# Altium PCB PCB1.PcbDoc
Units mil, origin at the board's own origin, x right, y up, seen from the top; angles counter-clockwise.
Board outline 2700 x 2100 mil, 2 copper layers (Top Layer, Bottom Layer); 51 components, 51 nets, 211 pads, 0 vias.
Unrouted connection lines stored in the file: 145.
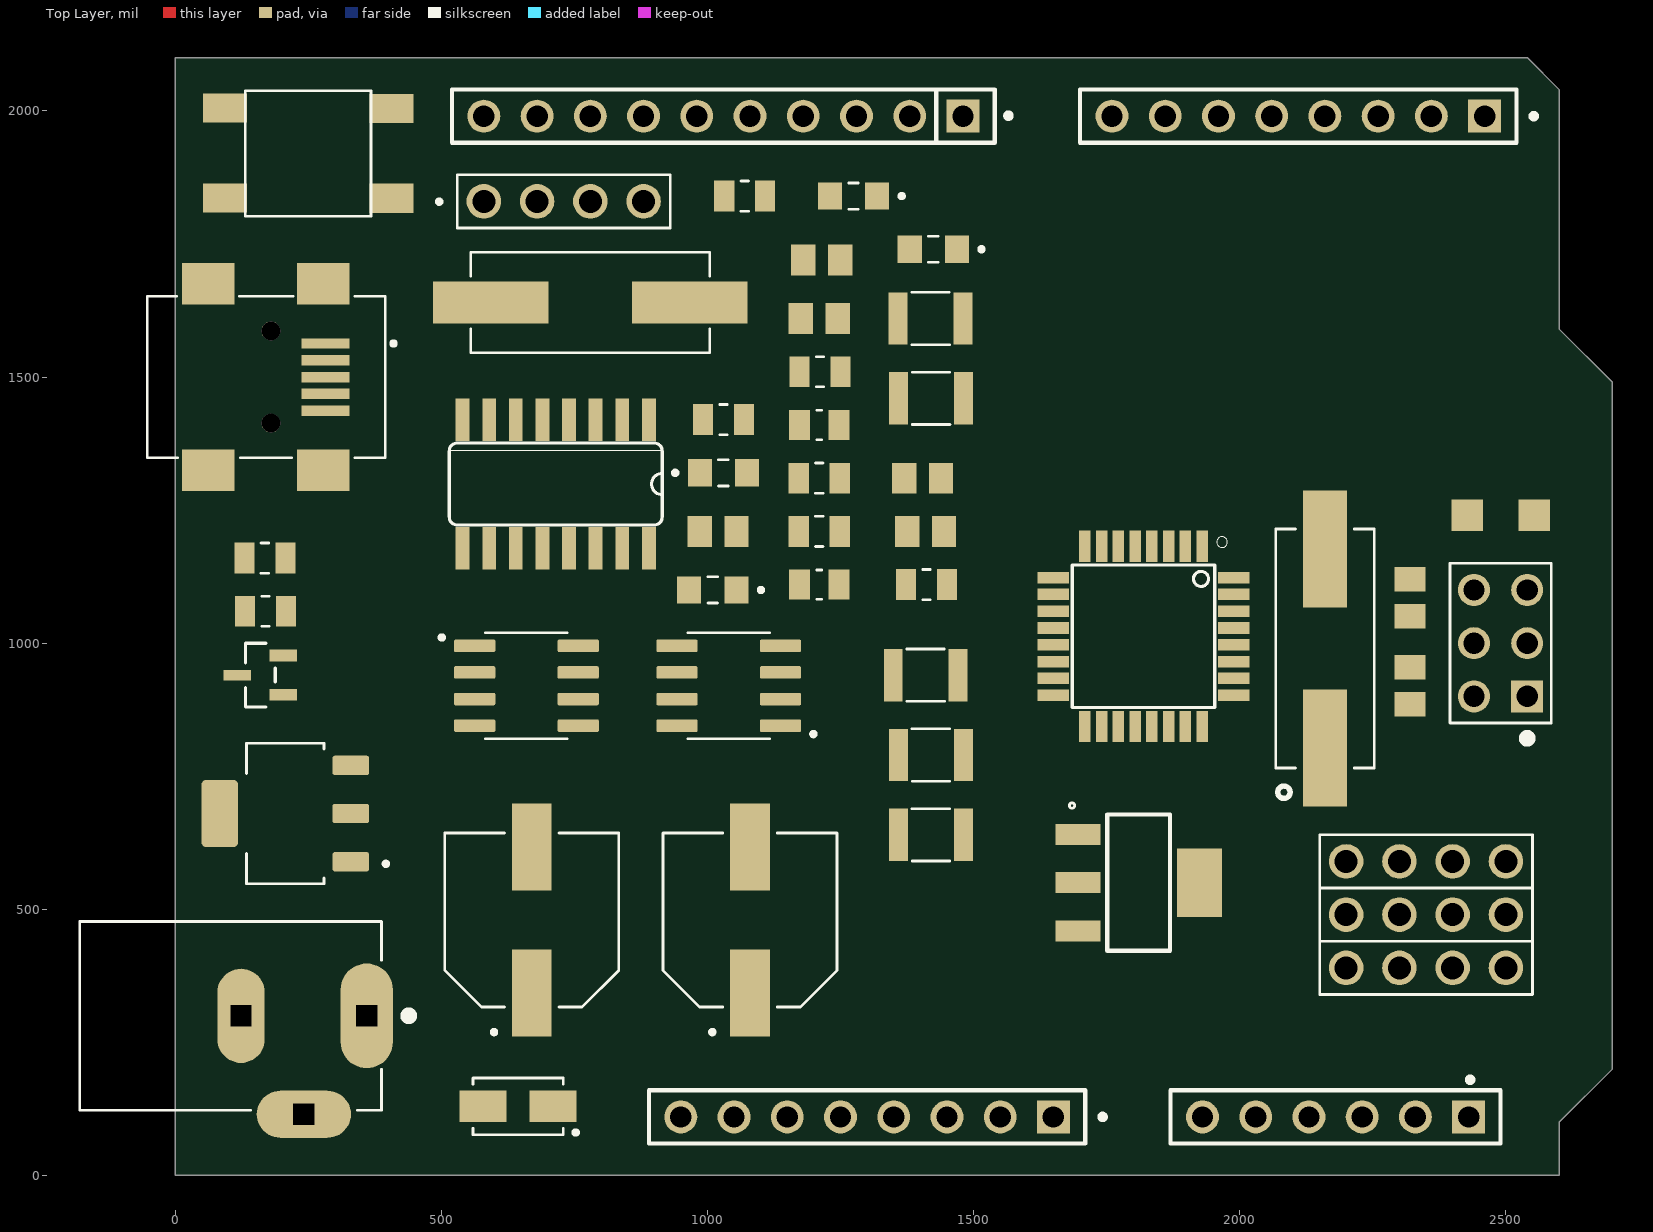
[diagram p0: Top Layer view]
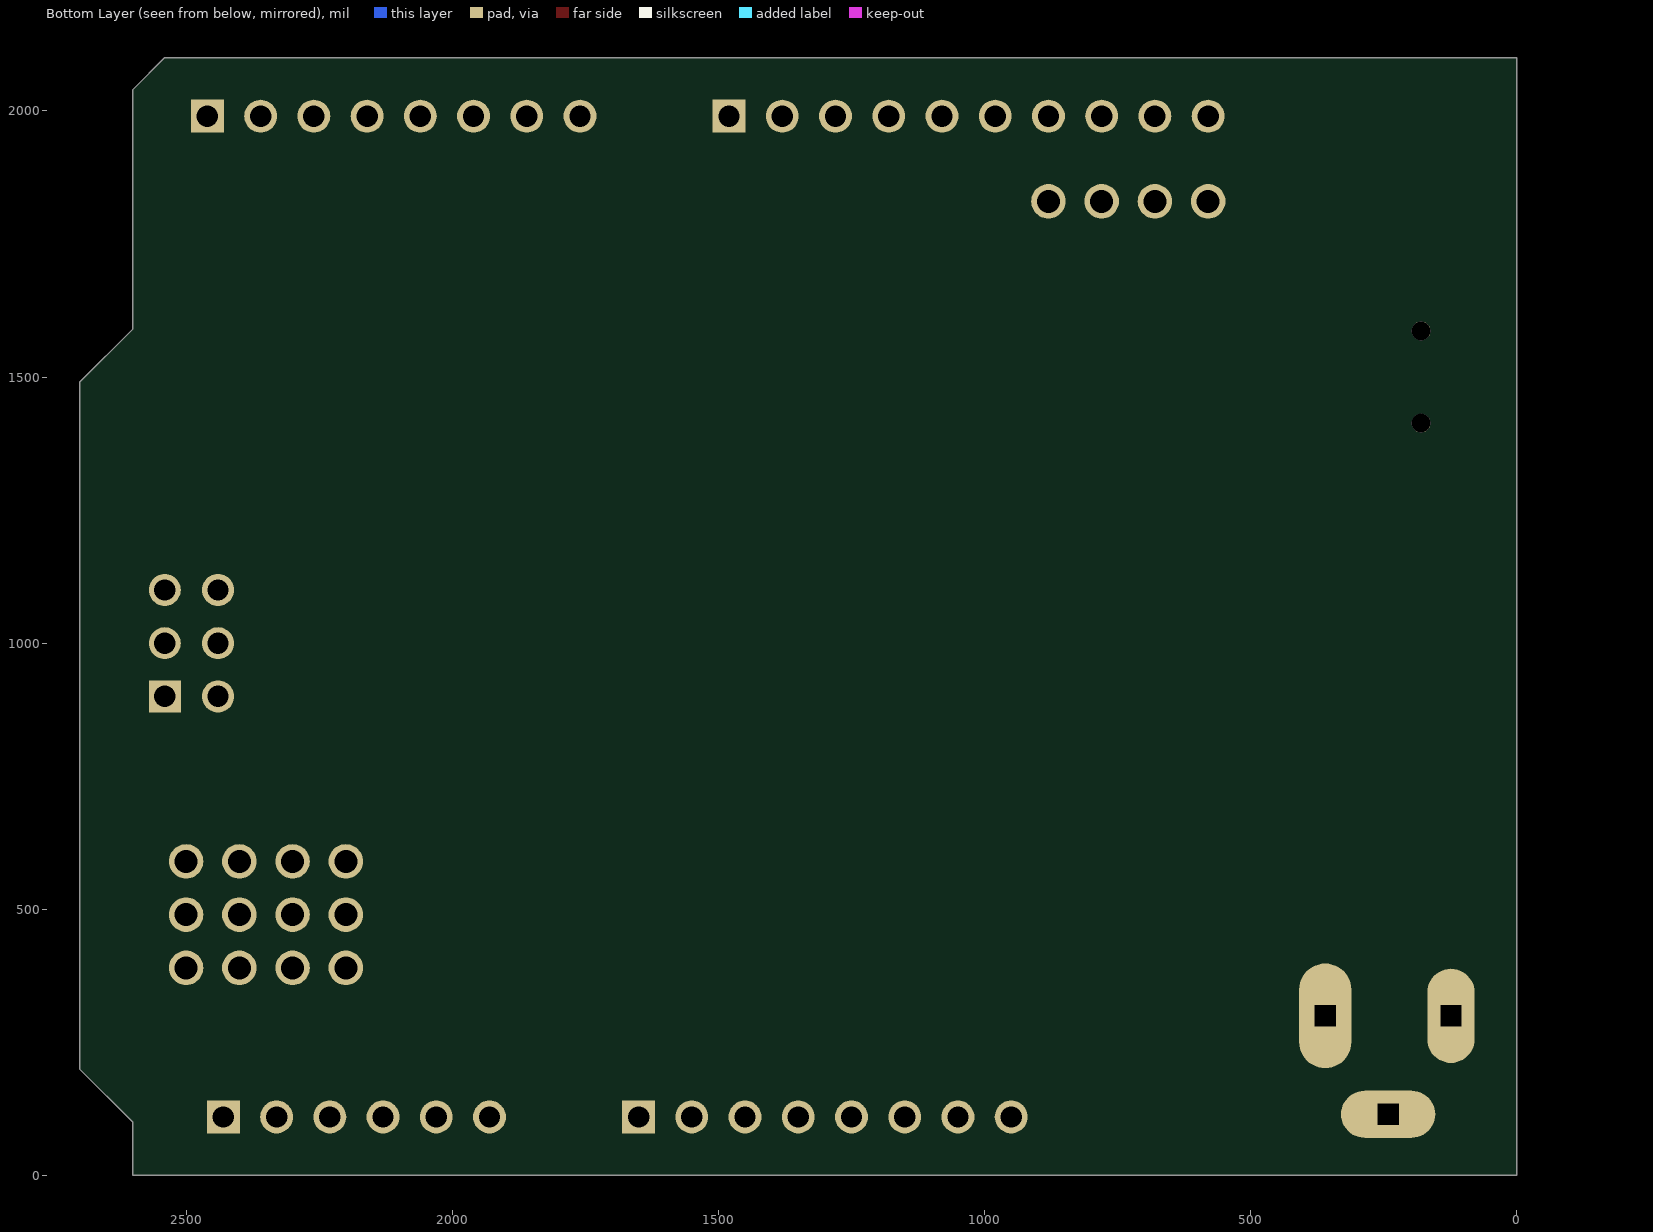
[diagram p1: Bottom Layer view, seen from below]

## Layer stack, top to bottom
Top Solder: solder mask 0.4, Solder Resist, Dk 3.5
Top Layer: signal copper 1.4
Dielectric 1: dielectric 12.6, FR-4, Dk 4.8
Bottom Layer: signal copper 1.4
Bottom Solder: solder mask 0.4, Solder Resist, Dk 3.5

## Board outline
0,0 2600,0 2600,100 2700,200 2700,1490 2600,1590 2600,2040 2540,2100 0,2100

## Design rules (kind name [scope] priority, off if disabled: settings)
Clearance [All] p1: gap=10 ignorepadtopadclearanceinfootprint=FALSE except(0: Arc-Hole Track-Hole SMDPad-Hole THPad-Hole Via-Hole Fill-Hole Poly-Hole Region-Hole Text-Hole)
PolygonConnect [All] p1: connectstyle=Relief reliefconductorwidth=10 reliefentries=4 polygonreliefangle="90 Angle" airgapwidth=10
RoutingVias [All] p1: holewidth=28 width=50 viastyle="Through Hole" minholewidth=28 minwidth=50 maxholewidth=28 maxwidth=50
SolderMaskExpansion [All] p1: expansion=4 istentingtop=FALSE
Width [All] p1: maxlimit=10 minlimit=10 preferedwidth=10
30 further rules are at their usual default settings.

## Classes and differential pairs
component class ARDUINO_UNO_CH340: 

## Components (designator, comment, footprint, x,y, rotation, side; value= is the part's Value field where it differs from the comment)
C1 "CAP ALUM 47UF 20% 25V SMD" CAP_25SVPD47M 1080,480 r90 top
C2 "CAP ALUM 47UF 20% 25V SMD" CAP_25SVPD47M 670,480 r90 top
C3 "C0805J104K5RACTU" CAPC2012X88N 1410,1210 r0 top
C4 "C0805J104K5RACTU" CAPC2012X88N 1404.45,1310 r0 top
C5 "CAP CER 25PF 100V NP0 0805" CAPC2012X94N 2320,920 r90 top
C6 "CAP CER 25PF 100V NP0 0805" CAPC2012X94N 2320,1085.35 r270 top
C7 "885012209041" WCAP-CSGP_885012209041 1420,790 r180 top
C8 "885012209041" WCAP-CSGP_885012209041 1410,940 r180 top
C9 "885012209041" WCAP-CSGP_885012209041 1420,1460 r0 top
C10 "885012209041" WCAP-CSGP_885012209041 1418.98,1610 r0 top
C11 "CAP CER 0805 10NF 50V C0G 1%" CAPC2012X88N 1020,1210 r180 top
C12 "885012209041" WCAP-CSGP_885012209041 1420,640 r180 top
C13 "CAP CER 25PF 100V NP0 0805" CAPC2012X94N 1210,1610 r0 top
C14 "CAP CER 25PF 100V NP0 0805" CAPC2012X94N 1214.65,1720 r0 top
CO1 "CRYSTAL 16.0000MHZ 18PF SMD" XTAL_ABLS2-24.000MHZ-D4YF-T 2160,990 r90 top
CP1 "CONN PWR JACK 2X5.5MM SOLDER" POWERJACK_CUI_PJ-002A 360,300 r180 top
D1 "S1M-FDITR-ND" DIODE_DIOM4226X244N 644.25,130 r180 top
D2 "7012X1" LED_7012X1 1424.29,1740 r180 top
D3 "7012X1" LED_7012X1 1274.29,1840 r180 top
D4 "DIODE GEN PURP 100V 150MA 1206" DIODE 2490,1240 r180 top
D5 "7012X1" LED_7012X1 1010,1100 r180 top
D6 "7012X1" LED_7012X1 1030,1320 r0 top
J1 "Conn_Sullins_PPTC081LFBN-RC_eec" Sullins_PPTC081LFBN-RC_0 1300,110 r180 top
J2 "Conn_Sullins_PPTC101LFBN-RC_eec" "Sullins_PPTC101LFBN-RC_0 - duplicate2" 1030,1990 r180 top locked
J3 "PPTC061LFBN-RC" Sullins_PPTC061LFBN-RC_0 2180,110 r180 top locked
J4 "Conn_Sullins_PPTC081LFBN-RC_eec" Sullins_PPTC081LFBN-RC_0 2110,1990 r180 top locked
J5 "1734035-4" J_SMD_1734035-4-5_0.8_9.9_8.85_3.9 180,1500 r270 top locked
J6 "67997-206HLF" FRAMATOME_67997-206HLF 2490,1000 r90 top locked
K1 "61300411121" 61300411121 2350,390 r180 top
K2 "61300411121" 61300411121 2350,490 r180 top
K3 "61300411121" 61300411121 730,1830 r180 top
K4 "61300411121" 61300411121 2350,590 r0 top
MC1 "ATMEGA328P-AU" QFP80P900X900X120-32N 1819.29,1012.76 r270 top
R1 "1kOhm,0805,1%,50ppm, 100mW,100VRN732ATTDK1001F50" RESC2012X60N 170,1060 r180 top
R2 "1kOhm,0805,1%,50ppm, 100mW,100VRN732ATTDK1001F50" RESC2012X60N 168.5,1160 r0 top
R3 "1kOhm,0805,1%,50ppm, 100mW,100VRN732ATTDK1001F50" RESC2012X60N 1210,1210 r180 top
R4 "1kOhm,0805,1%,50ppm, 100mW,100VRN732ATTDK1001F50" RESC2012X60N 1210,1310 r180 top
R5 "1kOhm,0805,1%,50ppm, 100mW,100VRN732ATTDK1001F50" RESC2012X60N 1411.5,1110 r0 top
R6 "1kOhm,0805,1%,50ppm, 100mW,100VRN732ATTDK1001F50" RESC2012X60N 1070,1840 r180 top
R7 "PICOSMDC050S-2" RESC2012X60N 1211.5,1510 r0 top
R8 "CRGCQ0805F10K" RESC2012X65N 1210,1110 r0 top
R9 "CRGCQ0805F10K" RESC2012X65N 1210,1410 r0 top
R10 "1kOhm,0805,1%,50ppm, 100mW,100VRN732ATTDK1001F50" RESC2012X60N 1030,1420 r0 top
S1 "2-1437565-8" SW_2-1437565-8 250,1920 r180 top
U1 "NCP1117ST50T3G" SOT230P700X180-4N 1810,550 r0 top
U2 "MCP1703T-3302E/DB" "SOT230P700X180-4N - duplicate" 206.97,680 r180 top
U3 "CH340 USB 2.0 to UART Interface Evaluation Board" SO16 715,1299 r180 top
U4 "LM358M/NOPB" SOIC127P599X175-8N 1040,920 r180 top
U5 "SI2301BDS-T1-E3" SOT95P237X112-3N 160,940 r180 top
U6 "LM358M/NOPB" SOIC127P599X175-8N 660,920 r0 top
Y1 "ECS-120-S-5PX-TR" XTAL_ECS-120-S-5PX-TR 780,1640 r180 top

## Footprints (in the part's own frame and the unit in brackets; to place one, negate y for a bottom-side part, rotate by r counter-clockwise, add the part's x,y. Pads: shape width x height; smd on the part's side, far side on the other; paste and mask are expansions set on the pad)
61300411121 [mm]
  round 1.65 hole 1.1: 1(-3.81,0) 2(-1.27,0) 3(1.27,0) 4(3.81,0)
  silkscreen extent -5.08,-1.27 5.08,1.27, body extent -5.01,-1.28 5.15,1.26, height 8.05
CAP_25SVPD47M [mm]
  rect 4.15x1.9 smd: 1(-3.475,0) 2(3.475,0)
  silkscreen extent -5.45,-4.15 4.15,4.15, body extent -3.25,-3.17 3.75,3.43, height 5.38
CAPC2012X88N [mm]
  rect 1.16x1.47 smd: 1(-0.875,0) 2(0.875,0)
  body extent -1.1,-0.73 1.1,0.72, height 0.98
CAPC2012X94N [mm]
  rect 1.16x1.47 smd: 1(-0.88,0) 2(0.88,0)
  body extent -1.01,-0.62 1.01,0.62, height 0.91
DIODE [mm]
  rect 1.5x1.5 smd: NEG(1.6,0) POS(-1.6,0)
  body extent -1.58,-0.65 1.42,0.65, height 0.75
DIODE_DIOM4226X244N [mm]
  rect 2.26x1.51 smd: 1(-1.67,0) 2(1.67,0)
  silkscreen extent -2.85,-1.35 2.15,1.35, body extent -2.6,-1.36 2.6,1.36, height 2.65
FRAMATOME_67997-206HLF [mm]
  rect 1.53x1.53 hole 1.02: 1(-2.54,-1.27)
  round 1.53 hole 1.02: 2(-2.54,1.27) 3(0,-1.27) 4(0,1.27) 5(2.54,-1.27) 6(2.54,1.27)
  silkscreen extent -4.74,-2.41 3.81,2.41, body extent -3.81,-2.41 3.81,2.41, height 8.39
J_SMD_1734035-4-5_0.8_9.9_8.85_3.9 [mm]
  rect 0.5x2.3 smd: 1(-1.6,2.6) 2(-0.8,2.6) 3(0,2.6) 4(0.8,2.6) 5(1.6,2.6)
  rect 2x2.5 smd: S1(-4.45,2.5) S2(4.45,2.5) S3(-4.45,-3) S4(4.45,-3)
  round 0.9 hole 0.9 unplated: ""(-2.2,0) ""(2.2,0)
  silkscreen extent -3.85,-5.9 3.85,5.95, body extent -4.99,-5.9 4.91,3.3, height 4.1
LED_7012X1 [mm]
  rect 1.15x1.3 smd: A(1.125,0) C(-1.125,0)
  silkscreen extent -2.4,-0.63 0.23,0.63, body extent -1.01,-0.62 1,0.62, height 0.75
POWERJACK_CUI_PJ-002A [mm]
  oval 2.5x5 hole 1 square: 1(0,0)
  oval 2.25x4.5 hole 1 square: 2(6,0)
  oval 4.5x2.25 hole 1 square: 3(3,4.7)
  silkscreen extent -2.2,-4.5 13.7,4.5, body extent -0.72,-4.83 13.68,4.57, height 11
QFP80P900X900X120-32N [mm]
  rect 1.5x0.55 smd: 1(-4.3,2.8) 2(-4.3,2) 3(-4.3,1.2) 4(-4.3,0.4) 5(-4.3,-0.4) 6(-4.3,-1.2) 7(-4.3,-2) 8(-4.3,-2.8) 17(4.3,-2.8) 18(4.3,-2) 19(4.3,-1.2) 20(4.3,-0.4) 21(4.3,0.4) 22(4.3,1.2) 23(4.3,2) 24(4.3,2.8)
  rect 0.55x1.5 smd: 9(-2.8,-4.3) 10(-2,-4.3) 11(-1.2,-4.3) 12(-0.4,-4.3) 13(0.4,-4.3) 14(1.2,-4.3) 15(2,-4.3) 16(2.8,-4.3) 25(2.8,4.3) 26(2,4.3) 27(1.2,4.3) 28(0.4,4.3) 29(-0.4,4.3) 30(-1.2,4.3) 31(-2,4.3) 32(-2.8,4.3)
  silkscreen extent -4.75,-3.4 3.4,4, body extent -4.42,-4.53 4.57,4.47, height 1.01
RESC2012X60N [mm]
  rect 0.96x1.47 smd: 1(-0.978,0) 2(0.978,0)
  silkscreen extent -0.18,-0.72 0.18,0.72, body extent -1.01,-0.61 0.99,0.64, height 0.61
RESC2012X65N [mm]
  rect 1x1.42 smd: 1(-0.935,0) 2(0.935,0)
  silkscreen extent -0.12,-0.7 0.12,0.7, body extent -0.99,-0.63 1.01,0.62, height 0.63
SO16 [mil]
  rect 26x80 smd: 1(-175,-121) 2(-125,-121) 3(-75,-121) 4(-25,-121) 5(25,-121) 6(75,-121) 7(125,-121) 8(175,-121) 9(175,121) 10(125,121) 11(75,121) 12(25,121) 13(-25,121) 14(-75,121) 15(-125,121) 16(-175,121)
  silkscreen extent -200,-77 200,77, body extent -197,-156 204,156, height 77
SOIC127P599X175-8N [mm]
  rrect25% 1.97x0.6 smd: 1(-2.47,1.905) 2(-2.47,0.635) 3(-2.47,-0.635) 4(-2.47,-1.905) 5(2.47,-1.905) 6(2.47,-0.635) 7(2.47,0.635) 8(2.47,1.905)
  silkscreen extent -4.14,-2.52 1.95,2.52, body extent -3,-2.45 3,2.45, height 1.73
SOT95P237X112-3N [mil]
  rect 52x22 smd: 1(-43,37) 2(-43,-37)
  rect 52x20 smd: 3(43,0)
  silkscreen extent -28,-60 28,60, body extent -49,-57 50,57, height 37
SOT230P700X180-4N [mm]
  rect 2.15x1 smd: 1(-2.9,2.3) 2(-2.9,0) 3(-2.9,-2.3)
  rect 2.15x3.25 smd: 4(2.9,0)
  silkscreen extent -3.3,-3.25 1.5,3.81, body extent -3.12,-3.2 3.88,3.3, height 1.65
"SOT230P700X180-4N - duplicate" [mm]
  rrect25% 1.76x0.92 smd: 1(-3.125,2.3) 2(-3.125,0) 3(-3.125,-2.3)
  rrect25% 1.76x3.19 smd: 4(3.125,0)
  silkscreen extent -4.9,-3.35 1.85,3.35, body extent -3.54,-3.26 3.46,3.24, height 1.8
Sullins_PPTC061LFBN-RC_0 [mm]
  rect 1.57x1.57 hole 1.02 paste-1000 mask+0: 1(-6.35,0)
  round 1.57 hole 1.02 paste-1000 mask+0: 2(-3.81,0) 3(-1.27,0) 4(1.27,0) 5(3.81,0) 6(6.35,0)
  silkscreen extent -7.87,-1.9 7.87,1.27, body extent -8.15,-1.47 8.15,1.47, height 0.25
Sullins_PPTC081LFBN-RC_0 [mm]
  rect 1.57x1.57 hole 1.02 paste-1000 mask+0: 1(-8.89,0)
  round 1.57 hole 1.02 paste-1000 mask+0: 2(-6.35,0) 3(-3.81,0) 4(-1.27,0) 5(1.27,0) 6(3.81,0) 7(6.35,0) 8(8.89,0)
  silkscreen extent -11.36,-1.27 10.41,1.27, body extent -10.69,-1.47 10.69,1.47, height 0.25
"Sullins_PPTC101LFBN-RC_0 - duplicate2" [mm]
  rect 1.57x1.57 hole 1.02 paste-1000 mask+0: 1(-11.43,0)
  round 1.57 hole 1.02 paste-1000 mask+0: 2(-8.89,0) 3(-6.35,0) 4(-3.81,0) 5(-1.27,0) 6(1.27,0) 7(3.81,0) 8(6.35,0) 9(8.89,0) 10(11.43,0)
  silkscreen extent -13.73,-1.27 12.95,1.27, body extent -13.23,-1.47 13.23,1.47, height 0.25
SW_2-1437565-8 [mm]
  rect 2.1x1.4 smd: 1(-3.974,2.135) 2(3.974,2.123) 3(-3.974,-2.148) 4(3.974,-2.168)
  silkscreen extent -6.35,-3 3,3, body extent -3.85,-3 3.85,3, height 4.13
WCAP-CSGP_885012209041 [mm]
  rect 0.9x2.5 smd: 1(-1.55,0) 2(1.55,0)
  silkscreen extent -0.9,-1.25 0.91,1.25, body extent -1.6,-1.25 1.6,1.25, height 0.96
XTAL_ABLS2-24.000MHZ-D4YF-T [mm]
  rect 5.6x2.1 smd: 1(-4.75,0) 2(4.75,0)
  silkscreen extent -7.15,-2.35 5.7,2.35, body extent -6.35,-2.48 6.35,2.35, height 4.03
XTAL_ECS-120-S-5PX-TR [mm]
  rect 5.5x2 smd: 1(-4.75,0) 2(4.75,0)
  silkscreen extent -5.7,-2.4 5.7,2.4, body extent -6.53,-2.4 6.67,2.4, height 4.31

## Part data
C1 C2: library part 25SVPD47M, "47 µF 25 V Aluminum Electrolytic Capacitors Radial, Can - SMD - 3000 Hrs @ 105°C", Package=None, Supplier Part Number 1=31T8177, Availability=Unavailable, MP=25SVPD47M, Price=None, Supplier 1=Newark
C3 C4: "CAP MLCC, 0.1UF, 50V, X7R, 10%, 0805; Product Range: KEMET - J Series; Capacitance", Package="0805 KEMET", Supplier Part Number 1=399-9997-1-ND, Availability=Warning, MF=KEMET, Mouser-Purchase-URL=https://snapeda.com/shop?store=Mouser&id=1757688, MP=C0805J104K5RACTU, Price=None, SnapEDA_Link=https://www.snapeda.com/parts/C0805J104K5RACTU/KEMET/view-part/1757688/?ref=snap, Supplier 1=Digi-Key
C5 C6 C13 C14: library part 08051A250GAT2A, "25 pF ±2% 100V Ceramic Capacitor C0G, NP0 0805 (2012 Metric)", Package=None, Supplier Part Number 1=08051A250GAT2A-ND, Availability=Unavailable, MP=08051A250GAT2A, Price=None, Supplier 1=Digi-Key
C7 C8 C9 C10 C12: "WCAP-CSGP General Purpose MLCC; SMT 1210; X7R; 100nF 10%; 50V; -55C to +125C; Tech. PN X7R1210104K050DFCT1000", Package=None, Availability=Unavailable, MP=885012209041, Price=None
C11: library part C0805C103F5GEC-ND, "±1% 50V Ceramic Capacitor C0G, NP0 0805 (2012 Metric)", Package="0805 KEMET", Availability=Warning, MF=KEMET, Mouser-Purchase-URL=https://snapeda.com/shop?store=Mouser&id=1757688, MP=C0805J104K5RACTU, Price=None, SnapEDA_Link=https://www.snapeda.com/parts/C0805J104K5RACTU/KEMET/view-part/1757688/?ref=snap, Supplier 1=Digi-Key, Supplier Part Number 1=C0805C103F5GEC-ND
CO1: library part ABLS2-24.000MHZ-D4YF-T, "24MHz Â±30ppm Crystal 18pF 40 Ohms HC-49/US", Package="HC49/US Abracon", Supplier Part Number 1=535-10212-1-ND, Availability=Good, Check_prices=https://www.snapeda.com/parts/ABLS2-24.000MHZ-D4YF-T/Abracon%20LLC/view-part/412221/?ref=eda, MF=Abracon, MP=ABLS2-24.000MHZ-D4YF-T, Price=None, Purchase-URL=https://pricing.snapeda.com/search/part/ABLS2-24.000MHZ-D4YF-T/?ref=eda, SnapEDA_Link=https://www.snapeda.com/parts/ABLS2-24.000MHZ-D4YF-T/Abracon%20LLC/view-part/412221/?ref=snap, Supplier 1=Digi-Key
CP1: library part CP-002A-ND, "Power Barrel Connector Jack 2.10mm ID (0.083\"), 5.50mm OD (0.217\") Through Hole, Right Angle", Supplier Part Number 1=PJ-002AH-SMT-TR, Supplier 1=Onlinecomponents.com
D1: library part DIODE_S1G, "DIODE GEN PURP 1KV 1A SMA", Package="DO-214AC-214 ON Semiconductor", Supplier Part Number 1=S1M-FDICT-ND, Availability=Unavailable, MF="ON Semiconductor", MP=ES1G, Price=None, SnapEDA_Link=https://www.snapeda.com/parts/ES1G/ON%20Semiconductor/view-part/1427700/?ref=snap, Supplier 1=Digi-Key
D2 D3 D5 D6: "Red LED Indication - Discrete 1.7V 0805 (2012 Metric)", Package=None, Supplier Part Number 1=732-4984-1-ND, Availability=Unavailable, MP=7012X1, Price=None, Supplier 1=Digi-Key
D4: library part CD1206-S01575, "Diode Standard 100V 150mA Surface Mount 1206", Package="1206 Bourns", Availability=Unavailable, MF=Bourns, MP=CD1206-S01575, Price=None, SnapEDA_Link=https://www.snapeda.com/parts/CD1206-S01575/Bourns%20-%20J.W.%20Miller/view-part/42622/?ref=snap, Supplier 1=Avnet, Supplier Part Number 1=CD1206-S01575
J1 J4: "CONN HEADER FEMALE 8POS .1\" TIN", Digikey Part Number=S7006-ND, Manufacturer=Sullins, Package=HDR8, Part Number=PPTC081LFBN-RC, Temperature="-40°C to +105°C", Temperature Range High=+105°C, Temperature Range Low=-40°C, ComponentLink1Description=Upverter, ComponentLink1URL=https://upverter.com/upn/revision/35dac8b21b21bbc7/, ComponentLink2Description=Datasheet, ComponentLink2URL=http://www.sullinscorp.com/drawings/78_P(N)PxCxxxLFBN-RC,_10492-H.pdf, Digikey Description="CONN HEADER FEMALE 8POS .1\" TIN", helpURL=https://upverter.com/upn/revision/35dac8b21b21bbc7/, Is Female=yes, Lead Free=yes, Price=0.506645376634, RoHS=TRUE, Supplier 1=Digi-Key, Supplier 2=Mouser, Supplier Part Number 1=S7006-ND
J2: "CONN HEADER FEMALE 10POS.1\" TIN", Digikey Part Number=S7008-ND, Manufacturer=Sullins, Octopart Part Number=a3ed6ae3a4397c2a, Package=HDR10, Part Number=PPTC101LFBN-RC, Temperature="-40°C to +105°C", Temperature Range High=+105°C, Temperature Range Low=-40°C, Category 75Fab8F04590Ae3D="Connectors and Adapters", Category 0836C53C3D42D3F1=Connectors, Category A3C16Ecb93907806=Uncategorized, Category Bda670Ac885E6661=Uncategorized, Category E7012A0Bd22E3Cc6="Headers & Receptacles", ComponentLink1Description=Upverter, ComponentLink1URL=https://upverter.com/upn/revision/438243a39a4aeeed/, ComponentLink2Description=Datasheet, ComponentLink2URL=http://www.sullinscorp.com/drawings/78_P(N)PxCxxxLFBN-RC,_10492-H.pdf, contact_material="Phosphor Bronze", Digikey Description="CONN HEADER FEMALE 10POS.1\" TIN", helpURL=https://upverter.com/upn/revision/438243a39a4aeeed/, housing_material=Plastic, Is Female=yes, Lead Free=yes, Mounting Type="through hole", Num Pins=10, Number_of_Positions=10, number_of_rows=1, pin_pitch="2.54 mm", Price=0.506714616829, RoHS=TRUE, Supplier 1=Digi-Key, Supplier 2=Mouser, Supplier Part Number 1=S7008-ND, Symbol 0 0=Standard, Type="integrated circuit"
J5: "Conn Mini USB 2.0 Type B RCP 5 POS 0.8mm Solder RA SMD 5 Terminal 1 Port Automotive T/R", Package=None, Centerline_Pitch=".8 mm[.031 in]", Digi-Key_Part_Number=A121554CT-ND, Digi-Key_Purchase_URL=https://www.digikey.com/product-detail/en/te-connectivity-amp-connectors/1734035-4/A121554CT-ND/5246531?utm_source=snapeda&utm_medium=aggregator&utm_campaign=symbol, EU_RoHS_Compliance=Compliant, MF="TE Connectivity", MP=1734035-4, Number_of_Positions=5, Product_Type=Connector, SnapEDA_Link=https://www.snapeda.com/parts/1734035-4/TE%20Connectivity%20AMP%20Connectors/view-part/422958/?ref=snap, TE_purchase_URL=https://www.te.com/usa-en/product-1734035-4.html?te_bu=Cor&te_type=disp&te_campaign=seda_glo_cor-seda-global-disp-prtnr-fy19-seda-model-bom-cta_sma-317_1&elqCampaignId=32493
J6: "Connector Header Through Hole 6 position 0.100 _2.54mm_", Package=None, Digi-Key_Part_Number=609-3234-ND, Digi-Key_Purchase_URL=https://www.digikey.com/product-detail/en/amphenol-icc-fci/67997-206HLF/609-3234-ND/1878491?utm_source=snapeda&utm_medium=aggregator&utm_campaign=symbol, MF="Amphenol ICC", MP=67997-206HLF, SnapEDA_Link=https://www.snapeda.com/parts/67997-206HLF/Amphenol%20FCI/view-part/103429/?ref=snap
K1 K2 K3 K4: "Connector Header Through Hole 4 position 0.100 (2.54mm)", Package=None, Availability="In Stock", Check_prices=https://www.snapeda.com/parts/61300411121/W%C3%BCrth%20Elektronik/view-part/4802916/?ref=eda, MF="WÃ¼rth Elektronik", MP=61300411121, Price=None, SnapEDA_Link=https://www.snapeda.com/parts/61300411121/W%C3%BCrth%20Elektronik/view-part/4802916/?ref=snap
MC1: "AVR AVRÂ® ATmega Microcontroller IC 8-Bit 20MHz 32KB _16K x 16_ FLASH 32-TQFP _7x7_", Package="TQFP-32 Microchip", Supplier Part Number 1=1310271, Availability=Unavailable, MF=Microchip, MP=ATMEGA328P-AU, Price=None, SnapEDA_Link=https://www.snapeda.com/parts/ATMEGA328P-AU/Microchip/view-part/44280/?ref=snap, Supplier 1=RSComponents
R1 R2 R3 R4 R5 R6 R10: "Thin Film Resistors - SMD 1kOhm,0805,1%,50ppm, 100mW,100V", Package=None, Supplier Part Number 1=7028531, Availability=Unavailable, MP=RN732ATTDK1001F50, Price=None, Supplier 1="Future Electronics"
R7: "Polymeric PTC Resettable Fuse 6V 500mA Ih Surface Mount 0805 _2012 Metric_, Concave", Package="0805 TE Connectivity", Supplier Part Number 1=PICOSMDC050S-2CT-ND, Availability=Unavailable, MF="Littelfuse Inc.", MP=PICOSMDC050S-2, Price=None, SnapEDA_Link=https://www.snapeda.com/parts/PICOSMDC050S-2/Littelfuse%20Inc./view-part/1315044/?ref=snap, Supplier 1=Digi-Key
R8 R9: "Fixed Resistor CRGCQ 0805 10K 1%", Package="2012 TE Connectivity", Supplier Part Number 1=A129761CT-ND, Arrow_Electronics-Purchase-URL=https://snapeda.com/shop?store=Arrow+Electronics&id=3188209, Availability=Unavailable, DigiKey-Purchase-URL=https://snapeda.com/shop?store=DigiKey&id=3188209, MF="TE Connectivity", MP=CRGCQ0805F10K, Price=None, SnapEDA_Link=https://www.snapeda.com/parts/CRGCQ0805F10K/TE%20Connectivity/view-part/3188209/?ref=snap, Supplier 1=Digi-Key
S1: "Tactile Switch SPST-NO Top Actuated Surface Mount", Contact_Current_Rating="50 mA", Package=None, Supplier Part Number 1=450-3355-ND, Availability=Unavailable, Configuration_Pole-Throw="Single Pole - Single Throw", MF="TE Connectivity", MP=2-1437565-8, Price=None, SnapEDA_Link=https://www.snapeda.com/parts/2-1437565-8/TE%20Connectivity%20ALCOSWITCH%20Switches/view-part/455292/?ref=snap, Supplier 1=Digi-Key, TE_purchase_URL=https://www.te.com/usa-en/product-2-1437565-8.html?te_bu=Cor&te_type=disp&te_campaign=seda_glo_cor-seda-global-disp-prtnr-fy19-seda-model-bom-cta_sma-317_1&elqCampaignId=32493
U1: "Linear Voltage Regulator IC 1 Output 1A SOT-223", Package="TO-261-4 ON Semiconductor", Supplier Part Number 1=71J6563, Availability=Unavailable, MF="ON Semiconductor", MP=NCP1117ST50T3G, Price=None, SnapEDA_Link=https://www.snapeda.com/parts/NCP1117ST50T3G/ON%20Semiconductor/view-part/836318/?ref=snap, Supplier 1=Newark
U2: "Linear Voltage Regulator IC 1 Output 250mA SOT-223-3", Package="SOT-223-3 Microchip", Availability=Unavailable, MF=Microchip, MP=MCP1703T-3302E/DB, Price=None, SnapEDA_Link=https://www.snapeda.com/parts/MCP1703T-3302E/DB/Microchip/view-part/1037153/?ref=snap
U3: library part CH340, Package=None, Supplier Part Number 1=317990026, Availability=Unavailable, MF=DFRobot, MP=CH340, Price=None, SnapEDA_Link=https://www.snapeda.com/parts/CH340/DFRobot/view-part/53354/?ref=snap, Supplier 1=Onlinecomponents.com
U4 U6: "2-Channel, 1MHz, industry standard, 32V op amp 8-SOIC 0 to 70", Package="SOIC-8 Texas Instruments", Check_prices=https://www.snapeda.com/parts/LM358M/Texas%20Instruments/view-part/4800527/?ref=eda, Digi-Key_Part_Number=LM358MX/NOPBTR-ND, DigiKey-Purchase-URL=https://snapeda.com/shop?store=DigiKey&id=4800527, MF="Texas Instruments", MP=LM358M, SnapEDA_Link=https://www.snapeda.com/parts/LM358M/Texas%20Instruments/view-part/4800527/?ref=snap
U5: "P-Channel 20V 2.2A _Ta_ 700mW _Ta_ Surface Mount SOT-23-3 _TO-236_", Package="SOT-23-3 Vishay", Availability=Unavailable, MF=Vishay, MP=SI2301BDS-T1-E3, Price=None, SnapEDA_Link=https://www.snapeda.com/parts/SI2301BDS-T1-E3/Vishay%20Siliconix/view-part/277675/?ref=snap
Y1: "12MHz Â±30ppm Crystal Series 50 Ohms HC-49/US", Package="HC49/US ECS International", Arrow_Electronics-Purchase-URL=https://snapeda.com/shop?store=Arrow+Electronics&id=2458096, Availability=Unavailable, DigiKey-Purchase-URL=https://snapeda.com/shop?store=DigiKey&id=2458096, MF="ECS Inc.", Mouser-Purchase-URL=https://snapeda.com/shop?store=Mouser&id=2458096, MP=ECS-120-S-5PX-TR, Price=None, SnapEDA_Link=https://www.snapeda.com/parts/ECS-120-S-5PX-TR/ECS%20Inc./view-part/2458096/?ref=snap

## Nets (pads, with @x,y where several pads share a name; then routed paths per layer and width w, separated by ;. In a path a pad name is that pad's centre, name@x,y a point inside that pad or via, vN(x,y) a via of type N, cw(c..) or ccw(c..) an arc to the next point about the centre after c; other vN are vias at no path point)
+3V: J1.4 K1.1 K1.2 U4.2
+3V3: C7.2 U2.3
+5: C2.1 C3.1 C4.1 C8.2 C10.1 C11.1 D4.NEG J1.2 J1.5 J6.2 K2.3 K3.3 MC1.4 MC1.6 MC1.18 R1.2 R2.1 R5.1 R6.2 U1.2 U1.4 U2.1 U3.16 U4.8 U5.2 U6.8
AD0: J3.1 MC1.23
AD1: J3.2 MC1.24
AD2: J3.3 MC1.25
AD3: J3.4 MC1.26
AD4/SDA: J2.2 J3.5 K2.2 MC1.27
AD5/SCL: J2.1 J3.6 K2.1 MC1.28
Aref: C9.2 J2.3 MC1.20
GND: C1.2 C2.2 C3.2 C4.2 C5.2 C6.2 C7.1 C8.1 C9.1 C10.2 C13.2 C14.2 CP1.2 CP1.3 D5.C D6.C J1.6 J1.7 J2.4 J5.S1 J5.S2 J5.S3 J5.S4 J6.6 K1.3 K1.4 K2.4 K3.4 MC1.3 MC1.5 MC1.21 R9.2 S1.1 S1.2 U1.1 U2.2 U2.4 U3.1 U4.4 U6.4
IO0/RX: D2.C J4.1 K3.1 MC1.30 R3.1
IO1/TX: D3.C J4.2 K3.2 MC1.31 R4.1
IO2: J4.3 MC1.32
IO3: J4.4 MC1.1
IO4: J4.5 MC1.2
IO5: J4.6 MC1.9
IO6: J4.7 MC1.10
IO7: J4.8 MC1.11
IO8: J2.10 MC1.12
IO9: J2.9 MC1.13
MISO: J2.6 J6.1 MC1.16
MOSI: J2.7 J6.4 MC1.15
NetC5_1: C5.1 CO1.1 MC1.8
NetC6_1: C6.1 CO1.2 MC1.7
NetC11_2: C11.2 U3.4
NetC12_2: C12.2 U3.13
NetC13_1: C13.1 U3.8 Y1.2
NetC14_1: C14.1 U3.7 Y1.1
NetCP1_1: CP1.1 D1.2
NetD2_A: D2.A R2.2
NetD3_A: D3.A R1.1
NetD5_A: D5.A R5.2
NetD6_A: D6.A R10.2
NetJ5_1: J5.1 R7.2
NetJ5_2: J5.2 U3.6
NetJ5_3: J5.3 U3.5
NetK4_1: K4.1 U3.9
NetK4_2: K4.2 U3.10
NetK4_3: K4.3 U3.12
NetK4_4: K4.4 U3.11
NetR3_2: R3.2 U3.2
NetR4_2: R4.2 U3.3
NetR7_1: R7.1 U5.3
NetR8_1: R8.1 R9.1 U4.3
NetR10_1: R10.1 U6.6 U6.7
NetU4_1: U4.1 U5.1
Reset: C12.1 D4.POS J1.3 J6.5 MC1.29 R6.1 S1.3 S1.4
SCK: J2.5 J6.3 MC1.17 U6.5
SS: J2.8 MC1.14
VIN: C1.1 D1.1 J1.8 R8.2 U1.3
pads on no net: J1.1 J5. J5.4 J5.5 MC1.19 MC1.22 U3.14 U3.15 U4.5 U4.6 U4.7 U6.1 U6.2 U6.3

## Text inside footprints (layer, text, board x,y; h text height)
J5: Mechanical 13 "PCB EDGE" at -22.33,1604.68 h32.06 r270